# Altium PCB 800U R3N3_SENSOR_V1.0.PcbDoc
Units mm, origin at the board's own origin, x right, y up, seen from the top; angles counter-clockwise.
Board outline 152.4 x 101.6 mm, 2 copper layers (Top Layer, Bottom Layer); 16 components, 9 nets, 28 pads, 7 vias.
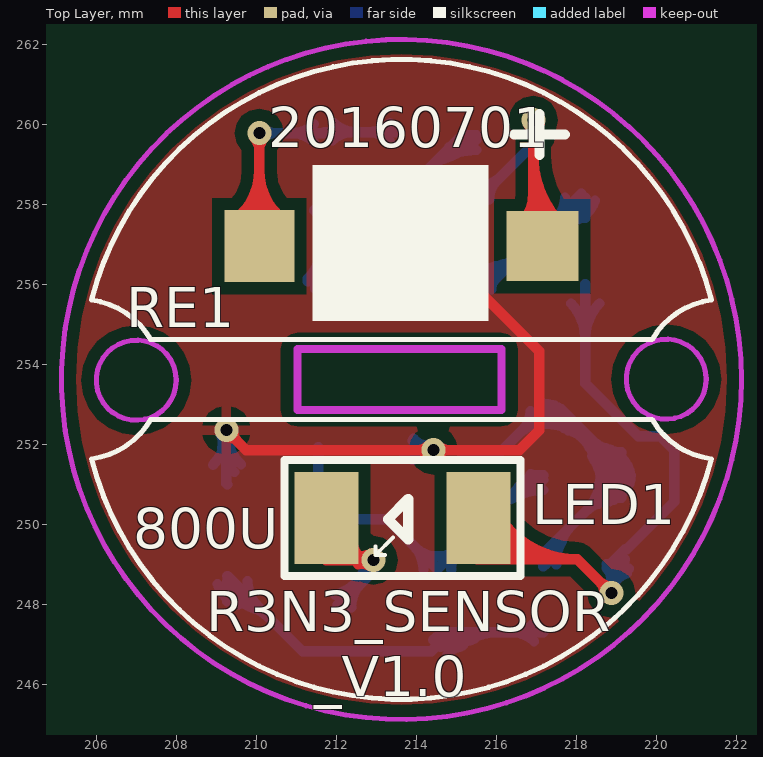
[diagram p0: Top Layer view]
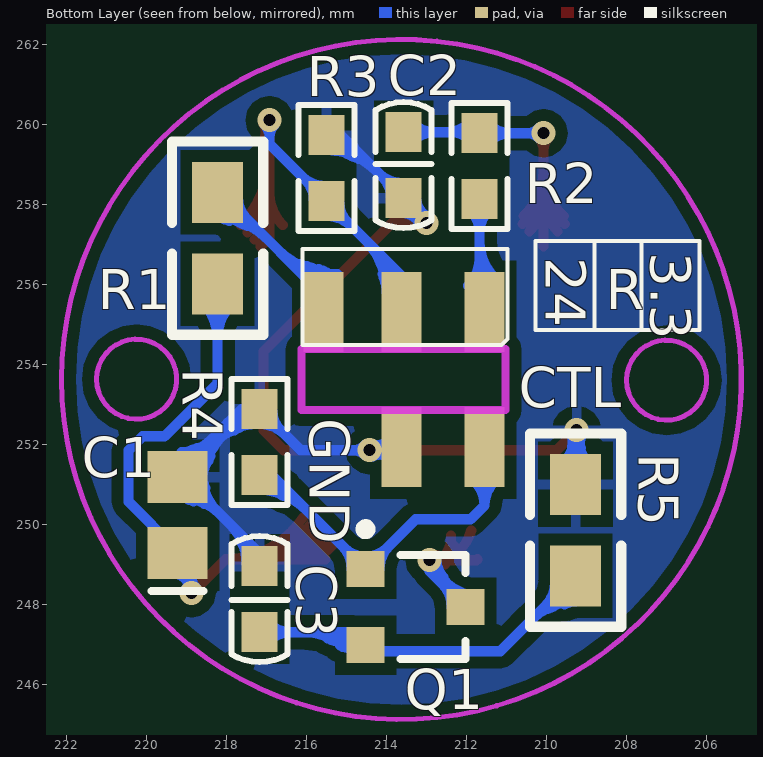
[diagram p1: Bottom Layer view, seen from below]

## Layer stack, top to bottom
Top Layer: signal copper 0.0356
Dielectric: dielectric 0.32, FR-4, Dk 4.8
Bottom Layer: signal copper 0.0356

## Board outline
162.425,214.025 314.825,214.025 314.825,315.625 162.425,315.625

## Design rules (kind name [scope] priority, off if disabled: settings)
Clearance [All] p1: gap=0.3
PlaneConnect [All] p1: planeconnectstyle=Direct reliefexpansion=0.508 reliefentries=4 reliefconductorwidth=0.254 reliefairgap=0.254
PolygonConnect [All] p1: connectstyle=Relief reliefconductorwidth=0.254 reliefentries=4 polygonreliefangle="90 Angle"
RoutingVias [All] p1: holewidth=0.3 width=0.6 viastyle="Through Hole" minholewidth=0.3 minwidth=0.6 maxholewidth=0.3 maxwidth=0.6
SilkscreenOverComponentPads [All] p1: minsilkscreentomaskgap=0.254
SolderMaskExpansion [All] p1: expansion=0.102
Width [All] p1: maxlimit=0.254 minlimit=0.254 preferedwidth=0.254
26 further rules are at their usual default settings.

## Components (designator, comment, footprint, x,y, rotation, side; value= is the part's Value field where it differs from the comment)
3.3 "" HOLE_SMD 211.55,255.3 r180 bottom (schematic designator 2)
24 "" HOLE_SMD 215.575,255.3 r180 bottom (schematic designator 1)
C1 "105" C0805 219.225,250.225 r90 bottom
C2 "105" C0603 213.575,259.8 r270 bottom
C3 "102" C0603 217.175,247.3 r90 bottom
CTL "" HOLE_SMD 211.55,251.925 r180 bottom (schematic designator LEDCTL1)
GND "" HOLE_SMD 213.625,251.925 r180 bottom (schematic designator GND1)
LED1 "SIR67-21C" LED-3.5X2.8 213.65,250.15 r180 top locked
Q1 "MMBT5551" SOT-23 213.275,247.925 r270 bottom
R "" HOLE_SMD 213.625,255.3 r180 bottom (schematic designator LED_R1)
R1 "100" R0805 218.225,257.15 r90 bottom
R2 "100" R0603 211.675,259.775 r270 bottom
R3 "10K" R0603 215.5,259.725 r270 bottom
R4 "10K" R0603 217.175,252.875 r270 bottom
R5 "15" R0805 209.275,249.85 r270 bottom
RE1 "PD70-01C" LED9*4 213.65,256.95 r90 top locked

## Footprints (in the part's own frame and the unit in brackets; to place one, negate y for a bottom-side part, rotate by r counter-clockwise, add the part's x,y. Pads: shape width x height; smd on the part's side, far side on the other; paste and mask are expansions set on the pad)
C0603 [mm]
  rect 1x0.9 smd: 1(0,0) 2(1.65,0)
  silkscreen extent -0.75,-0.7 2.4,0.7
C0805 [mm] "Chip Capacitor; Body 2.0 x 1.2"
  rect 1.3x1.5 smd: 1(-0.95,0) 2(0.95,0)
  silkscreen extent -1.9,-0.65 -1.9,0.65
HOLE_SMD [mm]
  rect 1x2 smd: 1(0,0)
LED9*4 [mm]
  rect 1.75x1.8 smd: 1(0,-3.5)
  rect 1.8x1.75 smd: 2(0,3.575)
  silkscreen extent -1.87,-4.06 3.3,2.24
LED-3.5X2.8 [mm]
  rect 1.6x2.3 smd: 1(-1.9,0) 2(1.9,0)
  silkscreen extent -2.95,-1.45 2.95,1.45
R0603 [mm]
  rect 1x0.9 smd: 1(0,0) 2(1.65,0)
  silkscreen extent -0.75,-0.7 2.4,0.7
R0805 [mil]
  rect 60x50 smd: 1(-45,0) 2(45,0)
  silkscreen extent -95,-45 95,45
SOT-23 [mm] "SOT-23; 3 Leads; Body 3.0 x 2.6 mm, in"
  rect 0.9x0.95 smd: 1(-0.95,-1.25) 2(0.95,-1.25) 3(0,1.25)
  silkscreen extent -2.07,-1.38 1.3,1.25

## Part data
3.3 24 CTL GND R: library part 焊
C1: library part Cap, "贴片电容"
C2 C3: library part Cap, "贴"
LED1: library part LED0, "贴"
Q1: library part NPN, "贴片NPN三极管"
R1 R2 R3 R4 R5: library part "Res Semi", "贴"
RE1: library part "Photo Sen", "贴"

## Via types
v1: diameter 0.6, hole 0.3, Top Layer to Bottom Layer, 7 vias

## Nets (pads, with @x,y where several pads share a name; then routed paths per layer and width w, separated by ;. In a path a pad name is that pad's centre, name@x,y a point inside that pad or via, vN(x,y) a via of type N, cw(c..) or ccw(c..) an arc to the next point about the centre after c; other vN are vias at no path point)
3.3V: 3.3.1 R2.2 | length 11.2
  Bottom Layer w0.254: 3.3.1@211.286,256.064 ccw(c210.348,257.002) 211.675,257.002 ; 3.3.1@211.286,256.139 ccw(c210.348,257.077) 211.675,257.077 ; 3.3.1@211.466,255.884 ccw(c210.961,256.389) 211.675,256.389 ; 3.3.1@211.466,255.959 ccw(c210.961,256.464) 211.675,256.464 ; 211.675,256.399 ccw(c212.149,256.399) 3.3.1@211.814,256.064 ; 211.675,256.474 ccw(c212.149,256.474) 3.3.1@211.814,256.139 ; 211.675,256.645 ccw(c212.645,256.645) 3.3.1@211.959,255.959 ; R2.2 211.675,255.575 3.3.1@211.875,255.375 ; R2.2@211.447,257.847 cw(c210.895,257.295) 211.675,257.295 ; R2.2@211.447,257.847 cw(c210.895,257.295) 211.675,257.295 ; R2.2@211.447,257.847 cw(c210.895,257.295) 211.675,257.295 ; 211.675,257.295 cw(c212.455,257.295) R2.2@211.903,257.847 ; 211.675,257.295 cw(c212.455,257.295) R2.2@211.903,257.847 ; 211.675,257.295 cw(c212.455,257.295) R2.2@211.903,257.847
+24V: 24.1 R1.2 | length 27
  Bottom Layer w0.254: 24.1@215.213,255.943 cw(c215.885,255.677) 215.698,256.375 ; 24.1@215.225,255.375 215.232,255.375 R1.2@218.125,258.268 ; 24.1@215.225,255.74 ccw(c215.225,256.638) 24.1@215.86,256.003 ; 24.1@215.225,255.994 ccw(c215.225,257.505) 216.294,256.437 ; 24.1@215.225,256.248 ccw(c215.225,258.373) 216.727,256.87 ; 24.1@215.376,255.929 cw(c216.226,255.555) 215.986,256.452 ; 24.1@215.448,255.846 cw(c216.272,255.547) 216.046,256.394 ; 24.1@215.45,255.85 cw(c216.47,255.445) 216.186,256.506 ; 24.1@215.5,255.994 ccw(c215.5,256.841) 216.099,256.242 ; 24.1@215.5,256.248 ccw(c215.5,257.709) 216.533,256.676 ; 24.1@215.873,255.875 cw(c216.213,255.875) 24.1@215.973,256.116 ; 217.013,257.156 cw(c218.225,255.944) R1.2@218.225,257.658 ; 217.013,257.156 cw(c218.225,255.944) R1.2@218.225,257.658 ; 217.013,257.156 cw(c218.225,255.944) R1.2@218.225,257.658 ; 217.447,257.59 cw(c218.225,256.811) R1.2@218.225,257.912 ; 217.447,257.59 cw(c218.225,256.811) R1.2@218.225,257.912 ; 217.447,257.59 cw(c218.225,256.811) R1.2@218.225,257.912 ; 217.465,257.454 ccw(c217.179,258.521) R1.2@218.225,258.166 ; 217.465,257.454 ccw(c217.179,258.521) R1.2@218.225,258.166 ; 217.465,257.454 ccw(c217.179,258.521) R1.2@218.225,258.166 ; 217.501,257.644 ccw(c216.978,258.166) R1.2@217.717,258.166 ; 217.501,257.644 ccw(c216.978,258.166) R1.2@217.717,258.166 ; 217.501,257.644 ccw(c216.978,258.166) R1.2@217.717,258.166 ; R1.2@217.924,257.577 ccw(c217.721,258.337) R1.2@218.466,258.084 ; R1.2@217.924,257.577 ccw(c217.721,258.337) R1.2@218.466,258.084 ; R1.2@217.924,257.577 ccw(c217.721,258.337) R1.2@218.466,258.084
GND: C1.2 C2.2 C3.2 GND.1 R3.1 R4.1 R5.1 | length 194.5
  Top Layer w0.254: v1(209.25,252.35) 209.75,251.85 v1(214.425,251.85) 216.575,251.85 217.075,252.35 217.075,254.325 213.875,257.525 v1(213,257.525) ; v1@209.25,252.177 cw(c209.25,251.759) 209.545,252.055 ; v1@209.25,252.177 cw(c209.25,251.759) 209.545,252.055 ; v1@209.25,252.177 cw(c209.25,251.759) 209.545,252.055 ; v1@209.423,252.35 ccw(c209.841,252.35) 209.545,252.055 ; v1@209.423,252.35 ccw(c209.841,252.35) 209.545,252.055 ; v1@209.423,252.35 ccw(c209.841,252.35) 209.545,252.055 ; v1@213.122,257.403 cw(c213.418,257.107) 213.418,257.525 ; v1@213.122,257.403 cw(c213.418,257.107) 213.418,257.525 ; v1@213.122,257.403 cw(c213.418,257.107) 213.418,257.525 ; v1@213.122,257.647 ccw(c213.418,257.943) 213.418,257.525 ; v1@213.122,257.647 ccw(c213.418,257.943) 213.418,257.525 ; v1@213.122,257.647 ccw(c213.418,257.943) 213.418,257.525 ; 214.007,251.85 cw(c214.007,251.432) v1@214.303,251.728 ; 214.007,251.85 ccw(c214.007,252.268) v1@214.303,251.972 ; 214.007,251.85 cw(c214.007,251.432) v1@214.303,251.728 ; 214.007,251.85 ccw(c214.007,252.268) v1@214.303,251.972 ; 214.007,251.85 ccw(c214.007,252.268) v1@214.303,251.972 ; 214.007,251.85 cw(c214.007,251.432) v1@214.303,251.728 ; v1@214.547,251.728 cw(c214.843,251.432) 214.843,251.85 ; v1@214.547,251.728 cw(c214.843,251.432) 214.843,251.85 ; v1@214.547,251.728 cw(c214.843,251.432) 214.843,251.85 ; v1@214.547,251.972 ccw(c214.843,252.268) 214.843,251.85 ; v1@214.547,251.972 ccw(c214.843,252.268) 214.843,251.85 ; v1@214.547,251.972 ccw(c214.843,252.268) 214.843,251.85
  Bottom Layer w0.254: R5.1 209.25,251.018 v1(209.25,252.35) ; v1(213,257.525) 213.575,258.1 C2.2 215.15,259.725 R3.1 ; v1@213.034,257.725 cw(c213.298,257.46) C2.2@213.447,257.804 ; C2.2@213.141,257.832 ccw(c212.873,258.1) C2.2@213.252,258.1 ; v1@213.2,257.559 ccw(c212.935,257.823) C2.2@213.279,257.972 ; C2.2@213.307,257.666 cw(c213.575,257.398) C2.2@213.575,257.777 ; GND.1@213.625,251.85 v1(214.425,251.85) ; GND.1@213.913,251.613 cw(c214.225,251.355) v1@214.225,251.76 ; GND.1@213.913,252.087 ccw(c214.225,252.345) v1@214.225,251.94 ; GND.1@213.927,252.144 ccw(c214.267,252.389) 214.267,251.97 ccw(c214.267,251.642) GND.1@213.966,251.774 ; GND.1@213.932,252.06 cw(c213.798,251.559) v1@214.268,251.777 ; GND.1@213.943,252.12 ccw(c214.425,252.415) v1(214.425,251.85) ; GND.1@213.986,251.755 cw(c214.225,251.692) v1@214.225,251.94 ; GND.1@213.986,251.945 ccw(c214.225,252.008) v1@214.225,251.76 ; GND.1@213.995,251.97 ccw(c214.267,252.003) v1@214.267,251.73 ; GND.1@214.057,251.773 cw(c214.131,251.496) v1@214.315,251.717 ; GND.1@214.065,251.775 ccw(c213.975,252.11) v1@214.275,251.936 ; v1@214.344,251.85 ccw(c214.344,251.206) GND.1@213.889,251.661 ; 214.993,259.26 cw(c215.289,258.966) R3.1@215.408,259.365 ; 215.016,259.283 ccw(c214.625,259.673) R3.1@215.177,259.674 ; C3.2 217.175,249.264 219.186,251.275 219.225,251.275 217.625,252.875 R4.1 216.15,251.85 v1(214.425,251.85) ; R4.1@217.267,252.515 cw(c217.386,252.109) 217.686,252.409 ; R4.1@217.498,252.825 ccw(c218.05,252.825) 217.66,252.435 ; 217.862,252.401 cw(c216.907,250.977) C1.2@218.607,251.205 ; 218.161,252.339 cw(c217.098,251.275) C1.2@218.602,251.275 ; 218.33,252.087 cw(c217.653,251.077) C1.2@218.858,251.239 ; 218.386,251.979 ccw(c219.494,252.276) C1.2@219.13,251.189 ; 218.403,252.097 ccw(c219.125,252.819) C1.2@219.125,251.798 ; 218.419,250.463 ccw(c218.169,251.396) C1.2@219.11,251.178 ; 218.426,250.516 cw(c219.282,250.287) C1.2@219.128,251.16 ; C1.2@218.509,251.523 ccw(c219.314,251.738) C1.2@219.049,250.948 ; C1.2@218.529,250.902 cw(c219.206,250.72) C1.2@219.083,251.41 ; 218.595,251.905 cw(c217.965,251.275) C1.2@218.856,251.275 ; 218.671,251.859 ccw(c218.933,252.249) C1.2@219.024,251.788 ; C1.2@218.828,250.572 ccw(c218.636,251.288) C1.2@219.358,251.121 ; R5.1@208.916,251.479 ccw(c208.109,252.286) v1@209.25,252.286 ; R5.1@208.916,251.479 ccw(c208.109,252.286) v1@209.25,252.286 ; R5.1@208.916,251.479 ccw(c208.109,252.286) v1@209.25,252.286 ; v1@209.1,252.264 cw(c208.69,252.026) 209.148,251.904 ; v1@209.1,252.264 cw(c208.69,252.026) 209.148,251.904 ; v1@209.1,252.264 cw(c208.69,252.026) 209.148,251.904 ; v1@209.1,252.264 cw(c208.69,252.026) 209.148,251.904 ; v1@209.1,252.264 cw(c208.69,252.026) 209.148,251.904 ; v1@209.1,252.264 cw(c208.69,252.026) 209.148,251.904 ; v1@209.128,252.228 cw(c208.832,251.932) 209.25,251.932 ; v1@209.128,252.228 cw(c208.832,251.932) 209.25,251.932 ; v1@209.128,252.228 cw(c208.832,251.932) 209.25,251.932 ; v1@209.164,252.2 cw(c208.955,251.839) 209.358,251.947 ; v1@209.164,252.2 cw(c208.955,251.839) 209.358,251.947 ; v1@209.164,252.2 cw(c208.955,251.839) 209.358,251.947 ; v1@209.164,252.2 cw(c208.955,251.839) 209.358,251.947 ; v1@209.164,252.2 cw(c208.955,251.839) 209.358,251.947 ; v1@209.164,252.2 cw(c208.955,251.839) 209.358,251.947 ; 209.168,251.981 cw(c209.517,251.887) v1@209.337,252.2 ; 209.168,251.981 cw(c209.517,251.887) v1@209.337,252.2 ; 209.168,251.981 cw(c209.517,251.887) v1@209.337,252.2 ; 209.168,251.981 cw(c209.517,251.887) v1@209.337,252.2 ; 209.168,251.981 cw(c209.517,251.887) v1@209.337,252.2 ; 209.168,251.981 cw(c209.517,251.887) v1@209.337,252.2 ; 209.25,251.764 ccw(c209.878,251.764) R5.1@209.449,251.305 ; 209.25,251.764 ccw(c209.878,251.764) R5.1@209.449,251.305 ; 209.25,251.764 ccw(c209.878,251.764) R5.1@209.449,251.305 ; 209.25,251.932 cw(c209.668,251.932) v1@209.372,252.228 ; 209.25,251.932 cw(c209.668,251.932) v1@209.372,252.228 ; 209.25,251.932 cw(c209.668,251.932) v1@209.372,252.228 ; v1(209.25,252.35) ccw(c210.428,252.35) R5.1@209.622,251.491 ; v1(209.25,252.35) ccw(c210.428,252.35) R5.1@209.622,251.491 ; v1(209.25,252.35) ccw(c210.428,252.35) R5.1@209.622,251.491 ; 209.358,251.947 cw(c209.762,252.055) v1@209.4,252.264 ; 209.358,251.947 cw(c209.762,252.055) v1@209.4,252.264 ; 209.358,251.947 cw(c209.762,252.055) v1@209.4,252.264 ; 209.358,251.947 cw(c209.762,252.055) v1@209.4,252.264 ; 209.358,251.947 cw(c209.762,252.055) v1@209.4,252.264 ; 209.358,251.947 cw(c209.762,252.055) v1@209.4,252.264 ; v1@212.955,257.692 ccw(c212.839,258.124) C2.2@213.227,257.9 ; v1@212.955,257.692 ccw(c212.871,258.006) C2.2@213.152,257.843 ; v1@212.955,257.692 ccw(c212.839,258.124) C2.2@213.227,257.9 ; v1@212.955,257.692 ccw(c212.839,258.124) C2.2@213.227,257.9 ; v1@212.955,257.692 ccw(c212.839,258.124) C2.2@213.227,257.9 ; v1@212.955,257.692 ccw(c212.871,258.006) C2.2@213.152,257.843 ; v1@212.955,257.692 ccw(c212.839,258.124) C2.2@213.227,257.9 ; v1@212.955,257.692 ccw(c212.871,258.006) C2.2@213.152,257.843 ; v1@212.955,257.692 ccw(c212.871,258.006) C2.2@213.152,257.843 ; v1@212.955,257.692 ccw(c212.871,258.006) C2.2@213.152,257.843 ; v1@212.955,257.692 ccw(c212.839,258.124) C2.2@213.227,257.9 ; v1@213,257.698 ccw(c213,258.116) C2.2@213.295,257.82 ; v1@213,257.698 ccw(c213,258.116) C2.2@213.295,257.82 ; v1@213,257.698 ccw(c213,258.116) C2.2@213.295,257.82 ; v1@213.024,257.549 cw(c213.575,256.997) C2.2@213.575,257.777 ; v1@213.024,257.549 ccw(c212.472,258.1) C2.2@213.252,258.1 ; v1@213.024,257.549 cw(c213.575,256.997) C2.2@213.575,257.777 ; v1@213.024,257.549 ccw(c212.472,258.1) C2.2@213.252,258.1 ; v1@213.024,257.549 ccw(c212.472,258.1) C2.2@213.252,258.1 ; v1@213.024,257.549 cw(c213.575,256.997) C2.2@213.575,257.777 ; v1@213.045,257.692 ccw(c213.145,258.067) C2.2@213.339,257.731 ; v1@213.045,257.692 ccw(c213.177,258.185) C2.2@213.432,257.743 ; v1@213.045,257.692 ccw(c213.145,258.067) C2.2@213.339,257.731 ; v1@213.045,257.692 ccw(c213.145,258.067) C2.2@213.339,257.731 ; v1@213.045,257.692 ccw(c213.145,258.067) C2.2@213.339,257.731 ; v1@213.045,257.692 ccw(c213.177,258.185) C2.2@213.432,257.743 ; v1@213.045,257.692 ccw(c213.145,258.067) C2.2@213.339,257.731 ; v1@213.045,257.692 ccw(c213.177,258.185) C2.2@213.432,257.743 ; v1@213.045,257.692 ccw(c213.177,258.185) C2.2@213.432,257.743 ; v1@213.045,257.692 ccw(c213.177,258.185) C2.2@213.432,257.743 ; v1@213.045,257.692 ccw(c213.145,258.067) C2.2@213.339,257.731 ; v1@213.057,257.683 ccw(c212.858,258.027) C2.2@213.254,258.067 ; v1@213.057,257.683 ccw(c212.858,258.027) C2.2@213.254,258.067 ; v1@213.057,257.683 ccw(c212.858,258.027) C2.2@213.254,258.067 ; v1@213.063,257.737 cw(c213.302,257.498) C2.2@213.442,257.806 ; v1@213.063,257.737 cw(c213.302,257.498) C2.2@213.442,257.806 ; v1@213.063,257.737 cw(c213.302,257.498) C2.2@213.442,257.806 ; v1@213.063,257.737 cw(c213.302,257.498) C2.2@213.442,257.806 ; v1@213.069,257.683 ccw(c213.154,257.877) C2.2@213.303,257.727 ; v1@213.069,257.683 ccw(c213.154,257.877) C2.2@213.303,257.727 ; v1@213.069,257.683 ccw(c213.154,257.877) C2.2@213.303,257.727 ; v1@213.069,257.683 ccw(c213.154,257.877) C2.2@213.303,257.727 ; C2.2@213.129,257.802 ccw(c212.831,258.1) C2.2@213.252,258.1 ; C2.2@213.129,257.802 ccw(c212.831,258.1) C2.2@213.252,258.1 ; C2.2@213.129,257.802 ccw(c212.831,258.1) C2.2@213.252,258.1 ; C2.2@213.129,257.802 ccw(c212.831,258.1) C2.2@213.252,258.1 ; v1@213.158,257.582 cw(c213.502,257.383) C2.2@213.542,257.779 ; v1@213.158,257.582 cw(c213.502,257.383) C2.2@213.542,257.779 ; v1@213.158,257.582 cw(c213.502,257.383) C2.2@213.542,257.779 ; v1@213.158,257.594 cw(c213.352,257.679) C2.2@213.202,257.828 ; v1@213.158,257.594 cw(c213.352,257.679) C2.2@213.202,257.828 ; v1@213.158,257.594 cw(c213.352,257.679) C2.2@213.202,257.828 ; v1@213.158,257.594 cw(c213.352,257.679) C2.2@213.202,257.828 ; C2.2@213.165,257.745 cw(c213.38,257.372) C2.2@213.491,257.788 ; C2.2@213.165,257.745 cw(c213.38,257.372) C2.2@213.491,257.788 ; C2.2@213.165,257.745 cw(c213.38,257.372) C2.2@213.491,257.788 ; v1@213.167,257.48 cw(c213.599,257.364) C2.2@213.375,257.752 ; v1@213.167,257.48 cw(c213.481,257.396) C2.2@213.318,257.677 ; v1@213.167,257.48 cw(c213.599,257.364) C2.2@213.375,257.752 ; v1@213.167,257.48 cw(c213.599,257.364) C2.2@213.375,257.752 ; v1@213.167,257.48 cw(c213.599,257.364) C2.2@213.375,257.752 ; v1@213.167,257.48 cw(c213.481,257.396) C2.2@213.318,257.677 ; v1@213.167,257.48 cw(c213.599,257.364) C2.2@213.375,257.752 ; v1@213.167,257.48 cw(c213.481,257.396) C2.2@213.318,257.677 ; v1@213.167,257.48 cw(c213.481,257.396) C2.2@213.318,257.677 ; v1@213.167,257.48 cw(c213.481,257.396) C2.2@213.318,257.677 ; v1@213.167,257.48 cw(c213.599,257.364) C2.2@213.375,257.752 ; v1@213.167,257.57 cw(c213.542,257.67) C2.2@213.206,257.864 ; v1@213.167,257.57 cw(c213.66,257.702) C2.2@213.218,257.957 ; v1@213.167,257.57 cw(c213.542,257.67) C2.2@213.206,257.864 ; v1@213.167,257.57 cw(c213.542,257.67) C2.2@213.206,257.864 ; v1@213.167,257.57 cw(c213.542,257.67) C2.2@213.206,257.864 ; v1@213.167,257.57 cw(c213.66,257.702) C2.2@213.218,257.957 ; v1@213.167,257.57 cw(c213.542,257.67) C2.2@213.206,257.864 ; v1@213.167,257.57 cw(c213.66,257.702) C2.2@213.218,257.957 ; v1@213.167,257.57 cw(c213.66,257.702) C2.2@213.218,257.957 ; v1@213.167,257.57 cw(c213.66,257.702) C2.2@213.218,257.957 ; v1@213.167,257.57 cw(c213.542,257.67) C2.2@213.206,257.864 ; v1@213.173,257.525 cw(c213.591,257.525) C2.2@213.295,257.82 ; v1@213.173,257.525 cw(c213.591,257.525) C2.2@213.295,257.82 ; v1@213.173,257.525 cw(c213.591,257.525) C2.2@213.295,257.82 ; v1@213.212,257.588 ccw(c212.973,257.827) C2.2@213.281,257.967 ; v1@213.212,257.588 ccw(c212.973,257.827) C2.2@213.281,257.967 ; v1@213.212,257.588 ccw(c212.973,257.827) C2.2@213.281,257.967 ; v1@213.212,257.588 ccw(c212.973,257.827) C2.2@213.281,257.967 ; C2.2@213.22,257.69 ccw(c212.847,257.905) C2.2@213.263,258.016 ; C2.2@213.22,257.69 ccw(c212.847,257.905) C2.2@213.263,258.016 ; C2.2@213.22,257.69 ccw(c212.847,257.905) C2.2@213.263,258.016 ; C2.2@213.277,257.654 cw(c213.575,257.356) C2.2@213.575,257.777 ; C2.2@213.277,257.654 cw(c213.575,257.356) C2.2@213.575,257.777 ; C2.2@213.277,257.654 cw(c213.575,257.356) C2.2@213.575,257.777 ; C2.2@213.277,257.654 cw(c213.575,257.356) C2.2@213.575,257.777 ; C2.2@213.575,258.523 ccw(c213.575,259.423) 214.212,258.787 ; C2.2@213.575,258.523 ccw(c213.575,259.423) 214.212,258.787 ; C2.2@213.575,258.523 ccw(c213.575,259.423) 214.212,258.787 ; GND.1@213.889,251.661 cw(c214.127,251.423) 214.127,251.76 ; GND.1@213.889,251.661 cw(c214.127,251.423) 214.127,251.76 ; GND.1@213.889,251.661 cw(c214.127,251.423) 214.127,251.76 ; C2.2@213.898,258.2 cw(c214.557,258.2) 214.091,258.666 ; C2.2@213.898,258.2 cw(c214.557,258.2) 214.091,258.666 ; C2.2@213.898,258.2 cw(c214.557,258.2) 214.091,258.666 ; GND.1@213.953,252.102 ccw(c214.225,252.249) v1@214.225,251.94 ; GND.1@213.953,252.102 ccw(c214.225,252.249) v1@214.225,251.94 ; GND.1@213.953,252.102 ccw(c214.225,252.249) v1@214.225,251.94 ; GND.1@213.965,251.772 cw(c214.225,251.655) v1@214.225,251.94 ; GND.1@213.965,251.772 cw(c214.225,251.655) v1@214.225,251.94 ; GND.1@213.965,251.772 cw(c214.225,251.655) v1@214.225,251.94 ; GND.1@213.996,251.966 ccw(c214.225,251.991) v1@214.225,251.76 ; GND.1@213.996,251.966 ccw(c214.225,251.991) v1@214.225,251.76 ; GND.1@213.996,251.966 ccw(c214.225,251.991) v1@214.225,251.76 ; GND.1@214.001,251.726 ccw(c213.884,252.162) v1@214.275,251.936 ; GND.1@214.001,251.726 ccw(c213.884,252.162) v1@214.275,251.936 ; GND.1@214.001,251.726 ccw(c213.884,252.162) v1@214.275,251.936 ; GND.1@214.007,251.85 cw(c214.007,251.432) v1@214.303,251.728 ; GND.1@214.007,251.85 ccw(c214.007,252.268) v1@214.303,251.972 ; GND.1@214.007,251.85 cw(c214.007,251.432) v1@214.303,251.728 ; GND.1@214.007,251.85 ccw(c214.007,252.268) v1@214.303,251.972 ; GND.1@214.007,251.85 ccw(c214.007,252.268) v1@214.303,251.972 ; GND.1@214.007,251.85 cw(c214.007,251.432) v1@214.303,251.728 ; GND.1@214.012,251.997 cw(c213.911,251.62) v1@214.267,251.779 ; GND.1@214.012,251.997 cw(c213.911,251.62) v1@214.267,251.779 ; GND.1@214.012,251.997 cw(c213.911,251.62) v1@214.267,251.779 ; GND.1@214.047,251.739 cw(c214.146,251.368) v1@214.338,251.7 ; GND.1@214.047,251.739 cw(c214.146,251.368) v1@214.338,251.7 ; GND.1@214.047,251.739 cw(c214.146,251.368) v1@214.338,251.7 ; GND.1@214.089,251.76 cw(c214.157,251.506) v1@214.319,251.714 ; GND.1@214.089,251.76 ccw(c214.021,252.014) v1@214.265,251.915 ; GND.1@214.089,251.76 cw(c214.157,251.506) v1@214.319,251.714 ; GND.1@214.089,251.76 ccw(c214.021,252.014) v1@214.265,251.915 ; GND.1@214.089,251.76 cw(c214.157,251.506) v1@214.319,251.714 ; GND.1@214.089,251.76 ccw(c214.021,252.014) v1@214.265,251.915 ; GND.1@214.089,251.76 ccw(c214.021,252.014) v1@214.265,251.915 ; GND.1@214.089,251.76 cw(c214.157,251.506) v1@214.319,251.714 ; GND.1@214.089,251.76 ccw(c214.021,252.014) v1@214.265,251.915 ; GND.1@214.089,251.76 cw(c214.157,251.506) v1@214.319,251.714 ; GND.1@214.089,251.94 cw(c214.021,251.686) v1@214.265,251.785 ; GND.1@214.089,251.94 ccw(c214.157,252.194) v1@214.319,251.986 ; GND.1@214.089,251.94 cw(c214.021,251.686) v1@214.265,251.785 ; GND.1@214.089,251.94 ccw(c214.157,252.194) v1@214.319,251.986 ; GND.1@214.089,251.94 cw(c214.021,251.686) v1@214.265,251.785 ; GND.1@214.089,251.94 ccw(c214.157,252.194) v1@214.319,251.986 ; GND.1@214.089,251.94 ccw(c214.157,252.194) v1@214.319,251.986 ; GND.1@214.089,251.94 cw(c214.021,251.686) v1@214.265,251.785 ; GND.1@214.089,251.94 ccw(c214.157,252.194) v1@214.319,251.986 ; GND.1@214.089,251.94 cw(c214.021,251.686) v1@214.265,251.785 ; GND.1@214.113,251.97 ccw(c214.19,252.258) v1@214.338,252 ; GND.1@214.113,251.97 ccw(c214.19,252.258) v1@214.338,252 ; GND.1@214.113,251.97 ccw(c214.19,252.258) v1@214.338,252 ; GND.1@214.113,251.97 ccw(c214.19,252.258) v1@214.338,252 ; GND.1@214.113,251.97 ccw(c214.19,252.258) v1@214.338,252 ; v1@214.172,251.806 ccw(c214.115,251.596) 213.935,251.717 cw(c214.115,251.596) v1@214.172,251.806 ; v1@214.172,251.806 cw(c214.237,252.049) 213.991,251.999 ccw(c214.237,252.049) v1@214.172,251.806 ; 214.266,258.841 cw(c215.5,257.607) R3.1@215.5,259.352 ; 214.266,258.841 cw(c215.5,257.607) R3.1@215.5,259.352 ; 214.266,258.841 cw(c215.5,257.607) R3.1@215.5,259.352 ; v1@214.273,251.933 cw(c213.835,252.173) 213.964,251.69 ccw(c213.835,252.173) v1@214.273,251.933 ; v1@214.273,251.933 cw(c214.059,252.05) 214.059,251.806 ccw(c214.059,252.05) v1@214.273,251.933 ; v1@214.303,251.728 ccw(c214.114,251.539) 214.114,251.806 cw(c214.114,251.539) v1@214.303,251.728 ; v1@214.338,251.7 ccw(c214.19,251.442) 214.113,251.73 cw(c214.19,251.442) v1@214.338,251.7 ; v1(214.425,251.85) cw(c214.425,252.521) 213.911,252.09 ccw(c214.425,252.521) v1(214.425,251.85) ; v1(214.425,251.85) ccw(c214.425,251.179) 213.911,251.61 cw(c214.425,251.179) v1(214.425,251.85) ; v1@214.547,251.728 cw(c214.843,251.432) 214.843,251.85 ; v1@214.547,251.728 cw(c214.843,251.432) 214.843,251.85 ; v1@214.547,251.728 cw(c214.843,251.432) 214.843,251.85 ; v1@214.547,251.972 ccw(c214.843,252.268) 214.843,251.85 ; v1@214.547,251.972 ccw(c214.843,252.268) 214.843,251.85 ; v1@214.547,251.972 ccw(c214.843,252.268) 214.843,251.85 ; 214.696,259.136 ccw(c214.379,260.318) R3.1@215.44,259.709 ; 214.696,259.136 ccw(c214.379,260.318) R3.1@215.44,259.709 ; 214.696,259.136 ccw(c214.379,260.318) R3.1@215.44,259.709 ; 214.699,259.274 cw(c215.5,258.474) R3.1@215.5,259.606 ; 214.699,259.274 cw(c215.5,258.474) R3.1@215.5,259.606 ; 214.699,259.274 cw(c215.5,258.474) R3.1@215.5,259.606 ; 214.822,259.424 ccw(c214.684,259.942) R3.1@215.193,259.775 ; 214.822,259.424 ccw(c214.684,259.942) R3.1@215.193,259.775 ; 214.822,259.424 ccw(c214.684,259.942) R3.1@215.193,259.775 ; 214.919,259.45 cw(c215.062,258.917) R3.1@215.339,259.395 ; 214.919,259.45 cw(c215.062,258.917) R3.1@215.339,259.395 ; 214.919,259.45 cw(c215.062,258.917) R3.1@215.339,259.395 ; 216.538,252.238 cw(c217.175,251.602) R4.1@217.175,252.502 ; 216.538,252.238 cw(c217.175,251.602) R4.1@217.175,252.502 ; 216.538,252.238 cw(c217.175,251.602) R4.1@217.175,252.502 ; 216.659,252.359 ccw(c216.193,252.825) R4.1@216.852,252.825 ; 216.659,252.359 ccw(c216.193,252.825) R4.1@216.852,252.825 ; 216.659,252.359 ccw(c216.193,252.825) R4.1@216.852,252.825 ; C3.2@217.146,249.063 ccw(c216.729,249.963) 217.687,249.706 ; C3.2@217.146,249.063 ccw(c216.729,249.963) 217.687,249.706 ; C3.2@217.146,249.063 ccw(c216.729,249.963) 217.687,249.706 ; R4.1@217.175,252.502 cw(c217.175,250.515) 218.58,251.92 ; R4.1@217.175,252.502 cw(c217.175,250.515) 218.58,251.92 ; R4.1@217.175,252.502 cw(c217.175,250.515) 218.58,251.92 ; R4.1@217.175,252.756 cw(c217.175,251.382) 218.146,252.354 ; R4.1@217.175,252.756 cw(c217.175,251.382) 218.146,252.354 ; R4.1@217.175,252.756 cw(c217.175,251.382) 218.146,252.354 ; R4.1@217.175,253.01 cw(c217.175,252.25) 217.713,252.787 ; R4.1@217.175,253.01 cw(c217.175,252.25) 217.713,252.787 ; R4.1@217.175,253.01 cw(c217.175,252.25) 217.713,252.787 ; R4.1@217.235,252.859 ccw(c218.302,253.475) 217.983,252.286 ; R4.1@217.235,252.859 ccw(c218.302,253.475) 217.983,252.286 ; R4.1@217.235,252.859 ccw(c218.302,253.475) 217.983,252.286 ; C3.2@217.244,249 cw(c218.047,249) 217.479,249.568 ; C3.2@217.244,249 cw(c218.047,249) 217.479,249.568 ; C3.2@217.244,249 cw(c218.047,249) 217.479,249.568 ; R4.1@217.337,252.545 cw(c217.613,252.067) 217.756,252.6 ; R4.1@217.337,252.545 cw(c217.613,252.067) 217.756,252.6 ; R4.1@217.337,252.545 cw(c217.613,252.067) 217.756,252.6 ; R4.1@217.467,252.964 ccw(c218.177,253.302) 217.973,252.542 ; R4.1@217.467,252.964 ccw(c218.177,253.302) 217.973,252.542 ; R4.1@217.467,252.964 ccw(c218.177,253.302) 217.973,252.542 ; C3.2@217.498,249 cw(c218.915,249) 217.913,250.002 ; C3.2@217.498,249 cw(c218.915,249) 217.913,250.002 ; C3.2@217.498,249 cw(c218.915,249) 217.913,250.002 ; C1.2@218.602,251.175 cw(c217.433,251.175) 218.26,250.348 ccw(c217.433,251.175) C1.2@218.602,251.175 ; C1.2@218.602,251.175 ccw(c216.857,251.175) 218.091,252.409 cw(c216.857,251.175) C1.2@218.602,251.175 ; C1.2@219.13,251.189 cw(c219.456,252.204) 218.427,251.928 ccw(c219.456,252.204) C1.2@219.13,251.189 ; GND.1@213.964,252.01 cw(c213.835,251.527) 214.273,251.767 ccw(c213.835,251.527) GND.1@213.964,252.01 ; 218.166,250.255 cw(c219.125,249.296) 219.125,250.652 ccw(c219.125,249.296) 218.166,250.255 ; 218.243,252.077 ccw(c219.196,252.475) 219.14,251.444 cw(c219.196,252.475) 218.243,252.077 ; 218.399,251.704 ccw(c219.172,252.026) 219.126,251.19 cw(c219.172,252.026) 218.399,251.704 ; 218.524,251.976 cw(c217.724,251.175) 218.856,251.175 ccw(c217.724,251.175) 218.524,251.976 ; C1.2@218.548,251.477 ccw(c219.286,251.675) 219.052,250.948 cw(c219.286,251.675) C1.2@218.548,251.477 ; 218.574,251.926 ccw(c219.125,252.478) 219.125,251.698 cw(c219.125,252.478) 218.574,251.926 ; C1.2@218.6,250.688 cw(c219.125,250.163) 219.125,250.906 ccw(c219.125,250.163) C1.2@218.6,250.688 ; 218.741,251.901 cw(c218.521,251.079) 219.361,251.212 ccw(c218.521,251.079) 218.741,251.901
LEDCTL: CTL.1 Q1.1 R4.2 | length 28.7
  Bottom Layer w0.254: CTL.1@211.292,251.081 cw(c210.71,250.475) 211.55,250.475 ; CTL.1@211.292,251.156 cw(c210.71,250.55) 211.55,250.55 cw(c212.39,250.55) CTL.1@211.808,251.156 ; 211.55,250.55 CTL.1 ; CTL.1@211.808,251.081 ccw(c212.39,250.475) 211.55,250.475 ; R4.2@216.852,251.161 cw(c216.322,251.138) 216.709,250.775 cw(c216.964,250.537) R4.2@217.074,250.868 ; R4.2 216.875,251.225 Q1.1 213.275,250.125 211.9,250.125 211.55,250.475 ; 216.026,250.376 cw(c217.175,249.227) R4.2@217.175,250.852 ; 216.026,250.376 cw(c217.175,249.227) R4.2@217.175,250.852 ; 216.026,250.376 cw(c217.175,249.227) R4.2@217.175,250.852 ; 216.407,250.646 ccw(c216.113,251.743) R4.2@217.114,251.208 ; 216.407,250.646 ccw(c216.113,251.743) R4.2@217.114,251.208 ; 216.407,250.646 ccw(c216.113,251.743) R4.2@217.114,251.208 ; 216.46,250.81 cw(c217.175,250.094) R4.2@217.175,251.106 ; 216.46,250.81 cw(c217.175,250.094) R4.2@217.175,251.106 ; 216.46,250.81 cw(c217.175,250.094) R4.2@217.175,251.106 ; 216.558,250.941 ccw(c216.448,251.352) R4.2@216.861,251.251 ; 216.558,250.941 ccw(c216.448,251.352) R4.2@216.861,251.251 ; 216.558,250.941 ccw(c216.448,251.352) R4.2@216.861,251.251 ; 216.594,250.95 cw(c216.737,250.417) R4.2@217.014,250.895 ; 216.594,250.95 cw(c216.737,250.417) R4.2@217.014,250.895 ; 216.594,250.95 cw(c216.737,250.417) R4.2@217.014,250.895 ; 213.931,249.469 cw(c213.337,248.875) 214.177,248.875 ccw(c213.337,248.875) 213.931,249.469 ; 213.991,249.409 ccw(c214.5,249.917) 214.5,249.198 cw(c214.5,249.917) 213.991,249.409 ; Q1.1@214.55,249.198 ccw(c214.55,249.917) 215.059,249.409 cw(c214.55,249.917) Q1.1@214.55,249.198 ; Q1.1@214.873,248.875 cw(c215.713,248.875) 215.119,249.469 ccw(c215.713,248.875) Q1.1@214.873,248.875
NetC1_1: C1.1 LED1.1 R1.1 | length 46.9
  Top Layer w0.254: LED1.1@215.238,249.612 ccw(c216.141,250.205) LED1.1@216.141,249.125 ; LED1.1@215.451,249.751 ccw(c216.612,250.515) 216.612,249.125 ; LED1.1@215.525,249.125 218.025,249.125 ; LED1.1@215.663,249.891 ccw(c217.083,250.824) 217.083,249.125 ; LED1.1@215.875,250.03 ccw(c217.554,251.134) 217.554,249.125 ; LED1.1@216.087,250.17 ccw(c218.025,251.444) 218.025,249.125 ; v1(218.875,248.275) 218.025,249.125 ; 216.696,249.199 ccw(c216.263,248.449) 215.848,249.209 cw(c216.263,248.449) 216.696,249.199 ; 216.696,249.199 cw(c217.223,250.112) 216.187,249.922 ccw(c217.223,250.112) 216.696,249.199 ; 218.58,248.57 cw(c218.284,248.275) v1@218.702,248.275 ; 218.58,248.57 ccw(c218.875,248.866) v1@218.875,248.448 ; 218.58,248.57 cw(c218.284,248.275) v1@218.702,248.275 ; 218.58,248.57 ccw(c218.875,248.866) v1@218.875,248.448 ; 218.58,248.57 ccw(c218.875,248.866) v1@218.875,248.448 ; 218.58,248.57 cw(c218.284,248.275) v1@218.702,248.275 ; LED1.1@215.726,249.432 cw(c216.009,248.913) 216.305,249.425 ccw(c216.009,248.913) LED1.1@215.726,249.432 ; LED1.1@215.821,249.421 ccw(c216.537,250.137) 216.537,249.125 cw(c216.537,250.137) LED1.1@215.821,249.421 ; LED1.1@216.001,249.601 ccw(c217.15,250.75) 217.15,249.125 cw(c217.15,250.75) LED1.1@216.001,249.601
  Bottom Layer w0.254: R1.1 218.225,253.525 219.55,252.2 220.1,252.2 220.45,251.85 220.45,250.561 219.264,249.375 219.225,249.375 218.875,249.025 v1(218.875,248.275) ; C1.1@218.755,249.005 cw(c218.466,248.716) C1.1@218.875,248.716 ; v1@218.875,248.247 cw(c219.562,248.247) C1.1@219.314,248.887 ; 218.875,248.618 cw(c219.418,248.618) C1.1@219.222,249.124 ; R1.1@217.866,255.521 cw(c216.999,254.654) 218.225,254.654 ; R1.1@217.866,255.521 cw(c216.999,254.654) 218.225,254.654 ; R1.1@217.866,255.521 cw(c216.999,254.654) 218.225,254.654 ; 218.225,254.654 cw(c219.451,254.654) R1.1@218.584,255.521 ; 218.225,254.654 cw(c219.451,254.654) R1.1@218.584,255.521 ; 218.225,254.654 cw(c219.451,254.654) R1.1@218.584,255.521 ; v1@218.753,248.397 ccw(c218.457,248.693) C1.1@218.875,248.693 ; v1@218.753,248.397 ccw(c218.457,248.693) C1.1@218.875,248.693 ; v1@218.753,248.397 ccw(c218.457,248.693) C1.1@218.875,248.693 ; v1@218.818,248.438 ccw(c218.739,248.664) 218.97,248.602 ; v1@218.818,248.438 ccw(c218.739,248.664) 218.97,248.602 ; v1@218.818,248.438 ccw(c218.739,248.664) 218.97,248.602 ; C1.1@218.875,248.693 ccw(c219.293,248.693) v1@218.997,248.397 ; C1.1@218.875,248.693 ccw(c219.293,248.693) v1@218.997,248.397 ; C1.1@218.875,248.693 ccw(c219.293,248.693) v1@218.997,248.397 ; 218.97,248.602 ccw(c219.222,248.535) v1@219.013,248.379 ; 218.97,248.602 ccw(c219.222,248.535) v1@219.013,248.379 ; 218.97,248.602 ccw(c219.222,248.535) v1@219.013,248.379 ; C1.1@218.755,248.905 cw(c218.466,248.616) 218.875,248.616 ccw(c218.466,248.616) C1.1@218.755,248.905 ; v1@218.875,248.244 cw(c219.426,248.244) 219.271,248.773 ccw(c219.426,248.244) v1@218.875,248.244 ; 218.875,248.583 cw(c219.327,248.583) 219.2,249.017 ccw(c219.327,248.583) 218.875,248.583
NetC2_1: C2.1 R2.1 RE1.2 | length 33.3
  Top Layer w0.254: RE1.2@209.546,257.504 ccw(c208.269,258.781) 210.075,258.781 ccw(c211.881,258.781) RE1.2@210.604,257.504 ; RE1.2@209.726,257.324 ccw(c208.882,258.168) 210.075,258.168 ccw(c211.268,258.168) RE1.2@210.424,257.324 ; v1@209.953,259.653 cw(c209.657,259.357) 210.075,259.357 cw(c210.493,259.357) v1@210.197,259.653 ; RE1.2 v1(210.075,259.775) ; 210.075,258.273 cw(c209.046,258.273) 209.741,257.514 ccw(c209.046,258.273) 210.075,258.273 ; 210.075,258.273 ccw(c211.104,258.273) 210.409,257.514 cw(c211.104,258.273) 210.075,258.273 ; 210.075,258.85 cw(c208.517,258.85) 209.57,257.701 ccw(c208.517,258.85) 210.075,258.85 ; 210.075,258.85 ccw(c211.633,258.85) 210.58,257.701 cw(c211.633,258.85) 210.075,258.85
  Bottom Layer w0.254: v1(210.075,259.775) R2.1 211.7,259.8 C2.1 ; v1@210.197,259.653 cw(c210.493,259.357) 210.493,259.775 ; v1@210.197,259.653 cw(c210.493,259.357) 210.493,259.775 ; v1@210.197,259.653 cw(c210.493,259.357) 210.493,259.775 ; v1@210.197,259.897 ccw(c210.493,260.193) 210.493,259.775 ; v1@210.197,259.897 ccw(c210.493,260.193) 210.493,259.775 ; v1@210.197,259.897 ccw(c210.493,260.193) 210.493,259.775 ; 210.895,259.775 cw(c210.895,258.995) R2.1@211.447,259.547 ; 210.895,259.775 ccw(c210.895,260.555) R2.1@211.447,260.003 ; 210.895,259.775 cw(c210.895,258.995) R2.1@211.447,259.547 ; 210.895,259.775 ccw(c210.895,260.555) R2.1@211.447,260.003 ; 210.895,259.775 ccw(c210.895,260.555) R2.1@211.447,260.003 ; 210.895,259.775 cw(c210.895,258.995) R2.1@211.447,259.547 ; R2.1@211.903,259.597 cw(c212.394,259.106) 212.394,259.8 ; R2.1@211.903,259.597 cw(c212.394,259.106) 212.394,259.8 ; R2.1@211.903,259.597 cw(c212.394,259.106) 212.394,259.8 ; R2.1@211.903,260.053 ccw(c212.515,260.665) 212.515,259.8 ; R2.1@211.903,260.053 ccw(c212.515,260.665) 212.515,259.8 ; R2.1@211.903,260.053 ccw(c212.515,260.665) 212.515,259.8 ; 212.795,259.8 cw(c212.795,259.02) C2.1@213.347,259.572 ; 212.795,259.8 ccw(c212.795,260.58) C2.1@213.347,260.028 ; 212.795,259.8 cw(c212.795,259.02) C2.1@213.347,259.572 ; 212.795,259.8 ccw(c212.795,260.58) C2.1@213.347,260.028 ; 212.795,259.8 ccw(c212.795,260.58) C2.1@213.347,260.028 ; 212.795,259.8 cw(c212.795,259.02) C2.1@213.347,259.572
NetC3_1: C3.1 Q1.2 R5.2 | length 41.7
  Bottom Layer w0.254: R5.2 211.157,246.825 214.375,246.825 Q1.2 214.85,247.3 C3.1 ; R5.2@209.031,248.509 ccw(c209.747,248.718) R5.2@209.554,247.997 ; R5.2@209.031,248.509 ccw(c209.747,248.718) R5.2@209.554,247.997 ; R5.2@209.031,248.509 ccw(c209.747,248.718) R5.2@209.554,247.997 ; R5.2@209.275,248.072 cw(c209.275,246.539) 210.359,247.623 ; R5.2@209.275,248.072 cw(c209.275,246.539) 210.359,247.623 ; R5.2@209.275,248.072 cw(c209.275,246.539) 210.359,247.623 ; R5.2@209.275,248.326 cw(c209.275,247.406) 209.925,248.057 ; R5.2@209.275,248.326 cw(c209.275,247.406) 209.925,248.057 ; R5.2@209.275,248.326 cw(c209.275,247.406) 209.925,248.057 ; R5.2@209.275,248.58 ccw(c210.254,248.866) 209.99,247.88 ; R5.2@209.275,248.58 ccw(c210.254,248.866) 209.99,247.88 ; R5.2@209.275,248.58 ccw(c210.254,248.866) 209.99,247.88 ; R5.2@209.783,248.58 ccw(c210.703,248.58) 210.052,247.93 ; R5.2@209.783,248.58 ccw(c210.703,248.58) 210.052,247.93 ; R5.2@209.783,248.58 ccw(c210.703,248.58) 210.052,247.93 ; Q1.2@214.419,247.106 cw(c214.888,246.637) Q1.2@214.888,247.3 ; Q1.2@214.419,247.106 cw(c214.888,246.637) Q1.2@214.888,247.3 ; Q1.2@214.419,247.106 cw(c214.888,246.637) Q1.2@214.888,247.3 ; Q1.2@214.596,247.027 ccw(c214.92,247.392) 215.164,246.969 ; Q1.2@214.596,247.027 ccw(c214.92,247.392) 215.164,246.969 ; Q1.2@214.596,247.027 ccw(c214.92,247.392) 215.164,246.969 ; Q1.2@214.599,246.926 cw(c215.501,246.024) 215.501,247.3 ; Q1.2@214.599,246.926 cw(c215.501,246.024) 215.501,247.3 ; Q1.2@214.599,246.926 cw(c215.501,246.024) 215.501,247.3 ; Q1.2@214.724,247.247 ccw(c214.939,247.581) 215.138,247.237 ; Q1.2@214.724,247.247 ccw(c214.939,247.581) 215.138,247.237 ; Q1.2@214.724,247.247 ccw(c214.939,247.581) 215.138,247.237 ; Q1.2@214.764,247.217 ccw(c215.166,247.671) 215.469,247.146 ; Q1.2@214.764,247.217 ccw(c215.166,247.671) 215.469,247.146 ; Q1.2@214.764,247.217 ccw(c215.166,247.671) 215.469,247.146 ; Q1.2@214.778,246.747 cw(c216.114,245.411) 216.114,247.3 ; Q1.2@214.778,246.747 cw(c216.114,245.411) 216.114,247.3 ; Q1.2@214.778,246.747 cw(c216.114,245.411) 216.114,247.3 ; Q1.2@214.862,246.891 cw(c215.395,246.748) 215.119,247.227 ; Q1.2@214.862,246.891 cw(c215.395,246.748) 215.119,247.227 ; Q1.2@214.862,246.891 cw(c215.395,246.748) 215.119,247.227 ; 216.395,247.3 cw(c216.395,246.52) C3.1@216.947,247.072 ; 216.395,247.3 ccw(c216.395,248.08) C3.1@216.947,247.528 ; 216.395,247.3 cw(c216.395,246.52) C3.1@216.947,247.072 ; 216.395,247.3 ccw(c216.395,248.08) C3.1@216.947,247.528 ; 216.395,247.3 ccw(c216.395,248.08) C3.1@216.947,247.528 ; 216.395,247.3 cw(c216.395,246.52) C3.1@216.947,247.072
NetLED1_2: LED1.2 Q1.3 | length 31.9
  Top Layer w0.254: LED1.2@211.725,249.125 211.75,249.1 v1(212.925,249.1) ; LED1.2@212.507,249.1 cw(c212.507,248.682) v1@212.803,248.978 ; LED1.2@212.507,249.1 ccw(c212.507,249.518) v1@212.803,249.222 ; LED1.2@212.507,249.1 cw(c212.507,248.682) v1@212.803,248.978 ; LED1.2@212.507,249.1 ccw(c212.507,249.518) v1@212.803,249.222 ; LED1.2@212.507,249.1 ccw(c212.507,249.518) v1@212.803,249.222 ; LED1.2@212.507,249.1 cw(c212.507,248.682) v1@212.803,248.978 ; 212.544,248.998 cw(c212.638,248.647) v1@212.832,248.954 ; 212.544,248.998 ccw(c212.45,249.349) v1@212.772,249.18 ; 212.544,248.998 cw(c212.638,248.647) v1@212.832,248.954 ; 212.544,248.998 ccw(c212.45,249.349) v1@212.772,249.18 ; 212.544,248.998 cw(c212.638,248.647) v1@212.832,248.954 ; 212.544,248.998 ccw(c212.45,249.349) v1@212.772,249.18 ; 212.544,248.998 ccw(c212.45,249.349) v1@212.772,249.18 ; 212.544,248.998 cw(c212.638,248.647) v1@212.832,248.954 ; 212.544,248.998 ccw(c212.45,249.349) v1@212.772,249.18 ; 212.544,248.998 cw(c212.638,248.647) v1@212.832,248.954 ; 212.569,249.195 ccw(c212.307,248.937) 212.101,249.242 cw(c212.307,248.937) 212.569,249.195 ; 212.569,249.195 cw(c213.016,249.637) 212.393,249.716 ccw(c213.016,249.637) 212.569,249.195 ; 212.571,249.195 cw(c212.493,248.904) v1@212.767,249.028 ; 212.571,249.195 ccw(c212.649,249.486) v1@212.824,249.241 ; 212.571,249.195 cw(c212.493,248.904) v1@212.767,249.028 ; 212.571,249.195 ccw(c212.649,249.486) v1@212.824,249.241 ; 212.571,249.195 cw(c212.493,248.904) v1@212.767,249.028 ; 212.571,249.195 ccw(c212.649,249.486) v1@212.824,249.241 ; 212.571,249.195 ccw(c212.649,249.486) v1@212.824,249.241 ; 212.571,249.195 cw(c212.493,248.904) v1@212.767,249.028 ; 212.571,249.195 ccw(c212.649,249.486) v1@212.824,249.241 ; 212.571,249.195 cw(c212.493,248.904) v1@212.767,249.028 ; v1(212.925,249.1) cw(c212.925,249.807) 212.31,249.458 ccw(c212.925,249.807) v1(212.925,249.1) ; LED1.2@211.885,249.842 ccw(c212.949,250.121) 212.664,249.058 cw(c212.949,250.121) LED1.2@211.885,249.842 ; LED1.2@212.254,249.295 ccw(c212.591,249.878) 212.857,249.259 cw(c212.591,249.878) LED1.2@212.254,249.295
  Bottom Layer w0.254: Q1.3 212.925,248.825 v1(212.925,249.1) ; Q1.3@211.966,248.237 ccw(c211.651,249.414) 212.706,248.805 ; Q1.3@211.966,248.237 ccw(c211.651,249.414) 212.706,248.805 ; Q1.3@211.966,248.237 ccw(c211.651,249.414) 212.706,248.805 ; Q1.3@212.032,247.992 ccw(c211.875,248.576) Q1.3@212.4,248.274 ; Q1.3@212.032,247.992 ccw(c211.875,248.576) Q1.3@212.4,248.274 ; Q1.3@212.032,247.992 ccw(c211.875,248.576) Q1.3@212.4,248.274 ; Q1.3@212.05,248.248 ccw(c212.05,248.967) 212.559,248.459 ; Q1.3@212.05,248.248 ccw(c212.05,248.967) 212.559,248.459 ; Q1.3@212.05,248.248 ccw(c212.05,248.967) 212.559,248.459 ; Q1.3@212.362,248.009 cw(c212.691,248.097) Q1.3@212.396,248.267 ; Q1.3@212.362,248.009 cw(c212.691,248.097) Q1.3@212.396,248.267 ; Q1.3@212.362,248.009 cw(c212.691,248.097) Q1.3@212.396,248.267 ; Q1.3@212.373,247.925 cw(c213.213,247.925) 212.619,248.519 ; Q1.3@212.373,247.925 cw(c213.213,247.925) 212.619,248.519 ; Q1.3@212.373,247.925 cw(c213.213,247.925) 212.619,248.519 ; Q1.3@212.435,248.335 ccw(c211.67,249.1) v1@212.752,249.1 ; Q1.3@212.435,248.335 ccw(c211.67,249.1) v1@212.752,249.1 ; Q1.3@212.435,248.335 ccw(c211.67,249.1) v1@212.752,249.1 ; 212.576,248.674 ccw(c212.15,249.1) v1@212.752,249.1 ; 212.576,248.674 ccw(c212.15,249.1) v1@212.752,249.1 ; 212.576,248.674 ccw(c212.15,249.1) v1@212.752,249.1 ; 212.576,248.674 ccw(c212.15,249.1) v1@212.752,249.1 ; 212.869,248.769 ccw(c212.538,249.1) v1@213.006,249.1 ; 212.869,248.769 ccw(c212.538,249.1) v1@213.006,249.1 ; 212.869,248.769 ccw(c212.538,249.1) v1@213.006,249.1
NetLED_R1_1: R3.2 R.1 RE1.1 | length 41.9
  Top Layer w0.254: RE1.1@216.596,257.479 ccw(c215.802,258.273) 216.925,258.273 ; 216.925,258.012 ccw(c218.187,258.012) RE1.1@217.295,257.12 ; 216.925,258.625 ccw(c218.8,258.625) RE1.1@217.474,257.299 ; 216.925,259.239 ccw(c219.414,259.239) RE1.1@217.654,257.479 ; v1(216.925,260.1) 216.925,257.175 RE1.1 ; v1@216.803,259.978 cw(c216.507,259.682) 216.925,259.682 ; v1@216.803,259.978 cw(c216.507,259.682) 216.925,259.682 ; v1@216.803,259.978 cw(c216.507,259.682) 216.925,259.682 ; v1@216.838,259.95 cw(c216.63,259.589) 217.033,259.697 ; v1@216.838,259.95 cw(c216.63,259.589) 217.033,259.697 ; v1@216.838,259.95 cw(c216.63,259.589) 217.033,259.697 ; 216.925,259.682 cw(c217.343,259.682) v1@217.047,259.978 ; 216.925,259.682 cw(c217.343,259.682) v1@217.047,259.978 ; 216.925,259.682 cw(c217.343,259.682) v1@217.047,259.978 ; 217.033,259.696 cw(c217.437,259.805) v1@217.075,260.013 ; 217.033,259.696 cw(c217.437,259.805) v1@217.075,260.013 ; 217.033,259.696 cw(c217.437,259.805) v1@217.075,260.013
  Bottom Layer w0.254: R.1@213.574,255.982 ccw(c213.034,257.111) 214.242,256.787 ; R.1@213.625,255.375 213.625,256.2 R3.2 216.925,259.5 v1(216.925,260.1) ; R.1@213.654,256.172 ccw(c213.678,256.484) R.1@213.882,256.246 ; R.1@213.683,255.753 ccw(c213.347,256.456) R.1@214.1,256.254 ; R.1@213.744,255.8 cw(c214.997,255.8) 214.111,256.686 ; 213.897,256.447 ccw(c214.388,256.316) R.1@213.948,256.062 ; R.1@213.97,255.941 cw(c214.36,256.101) 214.086,256.421 ; R.1@213.998,255.8 cw(c215.864,255.8) 214.545,257.12 ; 214.863,257.438 cw(c215.5,256.802) R3.2@215.5,257.702 ; 214.863,257.438 cw(c215.5,256.802) R3.2@215.5,257.702 ; 214.863,257.438 cw(c215.5,256.802) R3.2@215.5,257.702 ; 214.984,257.559 ccw(c214.518,258.025) R3.2@215.177,258.025 ; 214.984,257.559 ccw(c214.518,258.025) R3.2@215.177,258.025 ; 214.984,257.559 ccw(c214.518,258.025) R3.2@215.177,258.025 ; R3.2@215.5,258.448 ccw(c215.5,259.348) 216.137,258.712 ; R3.2@215.5,258.448 ccw(c215.5,259.348) 216.137,258.712 ; R3.2@215.5,258.448 ccw(c215.5,259.348) 216.137,258.712 ; R3.2@215.823,258.125 cw(c216.482,258.125) 216.016,258.591 ; R3.2@215.823,258.125 cw(c216.482,258.125) 216.016,258.591 ; R3.2@215.823,258.125 cw(c216.482,258.125) 216.016,258.591 ; v1@216.803,259.978 cw(c216.507,259.682) 216.925,259.682 ; v1@216.803,259.978 cw(c216.507,259.682) 216.925,259.682 ; v1@216.803,259.978 cw(c216.507,259.682) 216.925,259.682 ; 216.925,259.682 cw(c217.343,259.682) v1@217.047,259.978 ; 216.925,259.682 cw(c217.343,259.682) v1@217.047,259.978 ; 216.925,259.682 cw(c217.343,259.682) v1@217.047,259.978 ; R.1@213.57,255.905 ccw(c212.959,257.067) 214.226,256.727 cw(c212.959,257.067) R.1@213.57,255.905 ; R.1@213.688,255.681 ccw(c213.327,256.367) 214.076,256.166 cw(c213.327,256.367) R.1@213.688,255.681 ; R.1@213.744,255.875 cw(c214.816,255.875) 214.058,256.633 ccw(c214.816,255.875) R.1@213.744,255.875 ; 213.891,256.422 ccw(c214.445,256.274) 213.948,255.987 cw(c214.445,256.274) 213.891,256.422 ; R.1@213.998,255.875 cw(c215.683,255.875) 214.492,257.067 ccw(c215.683,255.875) R.1@213.998,255.875

## Polygon pours and split planes (outlines as drawn)
GND on Bottom Layer "TOP-No Net" (solid, remove dead copper, pour order 4): 205.1,262.175 222.1,262.175 222.125,262.15 222.125,245.05 205.125,245.05 205.1,245.025
GND on Top Layer "TOP-No Net" (solid, remove dead copper, pour order 3): 205.075,262.2 222.125,262.2 222.15,262.225 222.15,245.175 222.2,245.125 205.125,245.125 205.1,245.1

## Keep-outs
Keep-Out Layer:
  circle w0.127: c207,253.6 r1
  circle w0.127: c220.25,253.625 r1
  circle w0.127: c213.629,253.619 r8.5
  lines w0.2: 211.025,252.85 211.025,254.375 216.125,254.375 216.125,252.85 211.025,252.85

## Silkscreen, mask and mechanical layers (free items; w line width, h text height)
Top Overlay:
  lines w0.127: 205.879,251.635 ccw(c213.629,253.619) 221.379,251.635 cw(c221.629,253.619) 219.896,252.621 207.362,252.621 cw(c205.629,253.619) 205.879,251.635 ; 205.879,255.603 cw(c213.629,253.619) 221.379,255.603 ccw(c221.629,253.619) 219.896,254.617 207.362,254.617 ccw(c205.629,253.619) 205.879,255.603
  text "20160701" at 210.3,259.425 h1
  text "800U" at 206.925,249.4 h1
  text "R3N3_SENSOR" at 208.75,247.325 h1
  text "_V1.0" at 211.45,245.7 h1
Bottom Overlay:
  lines w0.1: 207.625,254.85 207.625,257.075 ; 208.8,254.85 208.8,257.075 ; 206.175,254.85 210.275,254.85 210.275,257.075 206.175,257.075 206.175,254.85 ; 210.975,254.625 211.125,254.475 216.1,254.475 216.1,256.875 210.975,256.875 210.975,254.625
Mechanical 1:
  circle w0.127: c213.629,253.619 r8.5
  circle w0.127: c220.25,253.625 r1
  circle w0.127: c207,253.6 r1
  lines w0.2: 211.025,252.85 211.025,254.375 216.125,254.375 216.125,252.85 211.025,252.85
Mechanical 3:
  lines w0.1: 205.1,253.6 222.129,253.6
  lines w0.127: 209.898,259.72 217.398,259.72 ; 209.987,259.723 ccw(c209.987,259.134) 209.398,259.134 209.398,254.72 ccw(c209.898,254.72) 209.898,254.22 217.398,254.22 ccw(c217.398,254.72) 217.898,254.72 217.898,259.22 ; 217.309,259.727 cw(c217.309,259.138) 217.898,259.138 ; 209.398,247.92 ccw(c209.898,247.92) 209.898,247.42 217.398,247.42 ccw(c217.398,247.92) 217.898,247.92 217.898,252.42 ccw(c217.398,252.42) 217.398,252.92 209.898,252.92 ccw(c209.898,252.42) 209.398,252.42 209.398,247.92
  lines w0.2: 213.625,245.45 213.625,261.5